# EAGLE board for_NI_multimeter (EAGLE 7.5.0)
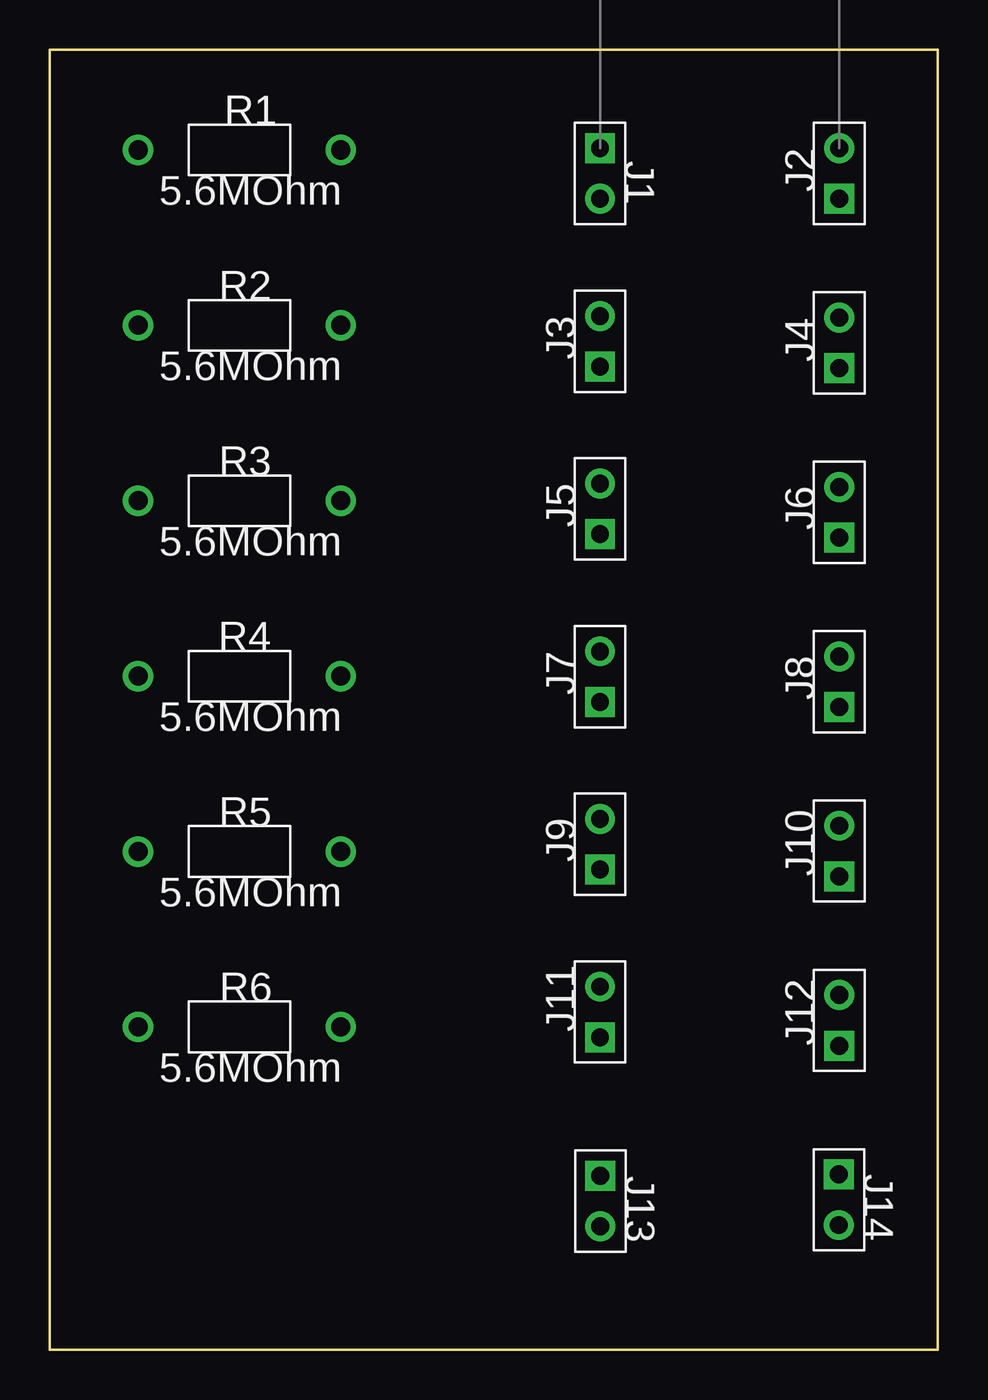
[diagram p0: board, top side]
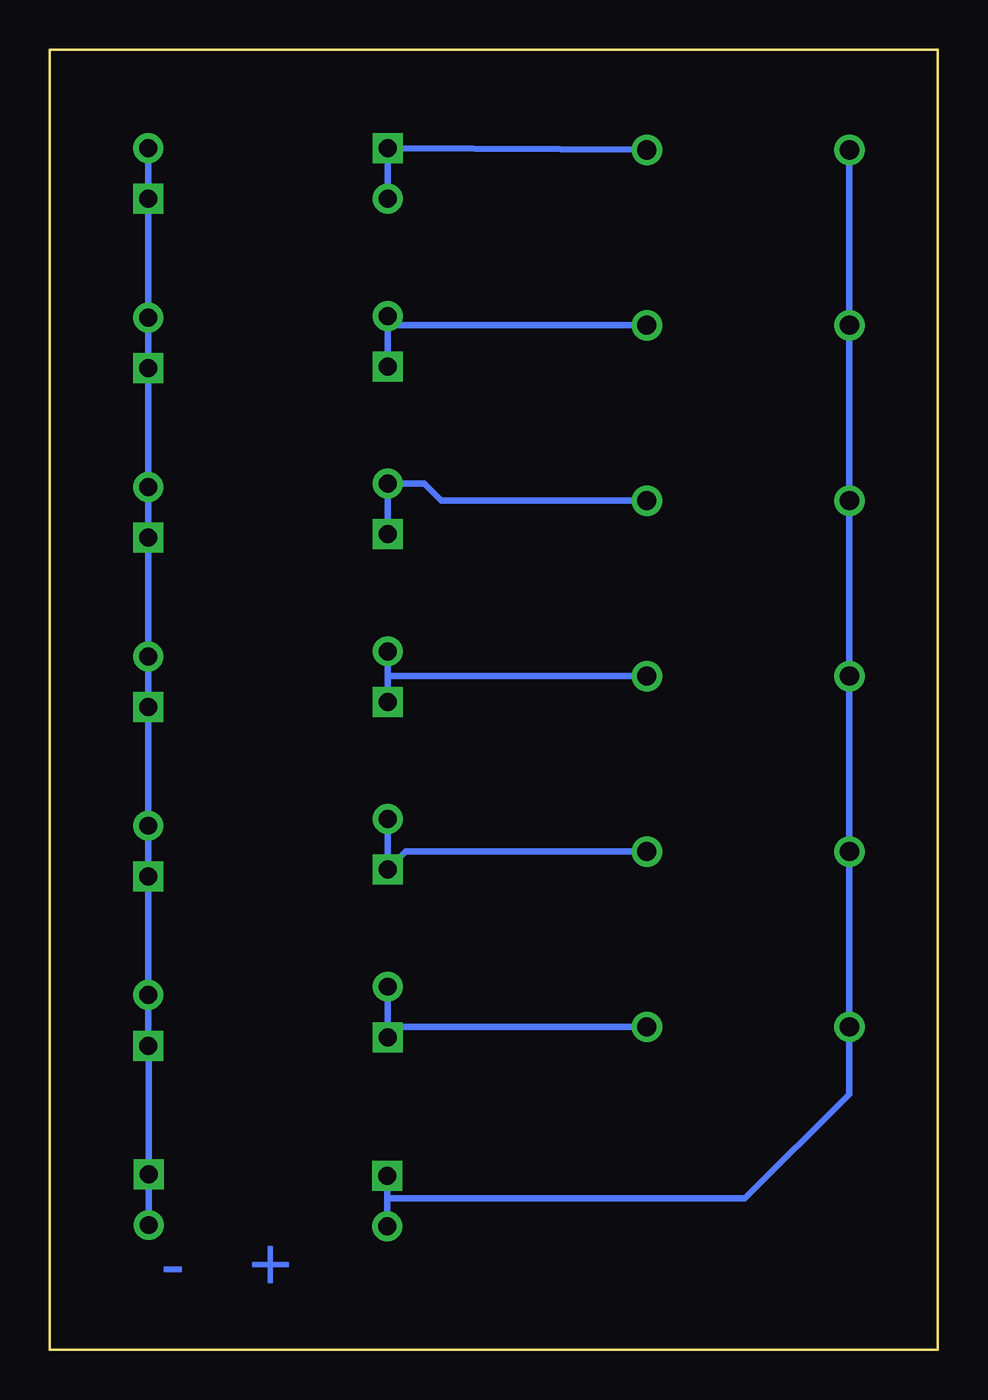
[diagram p1: board, bottom side, seen from below]

Size 44.53 x 65.21 mm. Coordinates in mm from the lower left corner, seen from the top.
Outline: 0,65.21 44.53,65.21 44.53,0 0,0 0,65.21
Copper layers (1*16): Top 0.035mm / dielectric 1.5mm / Bottom 0.035mm
Design rules "default *": minimum track width 10mil, minimum drill 0.61mm, track to track 8mil, track to pad 8mil, pad to pad 8mil, via to via 8mil, smd to smd 8mil, copper to edge 40mil, drill to drill 8mil, minimum pad ring 0mil, minimum via ring 8mil, stop-mask expansion 2mil, vias tented up to drill 19mil, thermal gap 10mil
Net classes: 0 Default: width 0.33 mm, clearance 0.33 mm

## Footprints (pad centres in the part's own frame; a part is rotated, then mirrored left to right if it is on the bottom)
HDR-1x2 = drill 0.9 pad 1.5 square: 1 -1.27,0 | drill 0.9 pad 1.5: 2 1.27,0
RES-10.16/5.1x2.5 = drill 0.965 pad 1.524: 1 -5.08,0; 2 5.08,0

## Placement (x,y rotation side)
J1  HDR-1X2  [HDR-1x2]  27.59,59 270 top
J2  HDR-1X2  [HDR-1x2]  39.59,59 90 top
J3  HDR-1X2  [HDR-1x2]  27.59,50.59 90 top
J4  HDR-1X2  [HDR-1x2]  39.59,50.5 90 top
J5  HDR-1X2  [HDR-1x2]  27.59,42.18 90 top
J6  HDR-1X2  [HDR-1x2]  39.59,42.01 90 top
J7  HDR-1X2  [HDR-1x2]  27.59,33.76 90 top
J8  HDR-1X2  [HDR-1x2]  39.59,33.51 90 top
J9  HDR-1X2  [HDR-1x2]  27.59,25.35 90 top
J10  HDR-1X2  [HDR-1x2]  39.59,25.02 90 top
J11  HDR-1X2  [HDR-1x2]  27.59,16.94 90 top
J12  HDR-1X2  [HDR-1x2]  39.59,16.52 90 top
J13  HDR-1X2  [HDR-1x2]  27.61,7.45 270 top
J14  HDR-1X2  [HDR-1x2]  39.57,7.52 270 top
R1  5.6MOhm  [RES-10.16/5.1x2.5]  9.51,60.19 0 top
R2  5.6MOhm  [RES-10.16/5.1x2.5]  9.51,51.39 0 top
R3  5.6MOhm  [RES-10.16/5.1x2.5]  9.51,42.59 0 top
R4  5.6MOhm  [RES-10.16/5.1x2.5]  9.51,33.79 0 top
R5  5.6MOhm  [RES-10.16/5.1x2.5]  9.51,24.99 0 top
R6  5.6MOhm  [RES-10.16/5.1x2.5]  9.51,16.19 0 top

## Library data of the parts
J1-J14 = common; UNIQUE_NAME: HDR-1x2
R1-R6 = common; UNIQUE_NAME: RES-10.16/5.1x2.5

## Nets
Net_0: J1.1 J1.2 R1.2
Net_1: J2.1 J2.2 J4.1 J4.2 J6.1 J6.2 J8.1 J8.2 J10.1 J10.2 J12.1 J12.2 J14.1 J14.2
Net_2: J3.1 J3.2 R2.2
Net_3: J5.1 J5.2 R3.2
Net_4: J7.1 J7.2 R4.2
Net_5: J9.1 J9.2 R5.2
Net_6: J11.1 J11.2 R6.2
Net_7: J13.1 J13.2 R1.1 R2.1 R3.1 R4.1 R5.1 R6.1

## Tracks (layer width: path | path; a pad name or v marks a point on that pad's centre or on a via)
Net_0
  Bottom 0.33: J1.2 J1.1 R1.2
Net_1
  Bottom 0.33: J2.2 J2.1 J4.2 J4.1 J6.2 J6.1 J8.2 J8.1 J10.2 J10.1 J12.2 J12.1 39.57,15.27 J14.1 J14.2
Net_2
  Bottom 0.33: J3.1 J3.2 27.12,51.39 R2.2
Net_3
  Bottom 0.33: J5.1 J5.2 25.76,43.45 24.9,42.59 R3.2
Net_4
  Bottom 0.33: J7.1 J7.2 27.59,33.79 R4.2
Net_5
  Bottom 0.33: R5.2 26.68,24.99 J9.1 J9.2
Net_6
  Bottom 0.33: R6.2 27.07,16.19 J11.1 J11.2
Net_7
  Bottom 0.33: R1.1 R2.1 R3.1 R4.1 R5.1 R6.1 4.43,12.82 9.67,7.58 27.61,7.58 J13.2 J13.1

## Text on the board
Bottom: - +
tPlace: R1 | J1 | 5.6MOhm | J2 | R2 | 5.6MOhm | J3 | J4 | R3 | 5.6MOhm | J5 | J6 | R4 | 5.6MOhm | J7 | J8 | R5 | 5.6MOhm | J9 | J10 | R6 | J11 | 5.6MOhm | J12 | J13 | J14